# Altium PCB DRL10F322.PCBDOC
Units mm, origin at the board's own origin, x right, y up, seen from the top; angles counter-clockwise.
Board outline 152.4 x 101.6 mm, 2 copper layers (Top Layer, Bottom Layer); 35 components, 19 nets, 80 pads, 0 vias.
Unrouted connection lines stored in the file: 36.
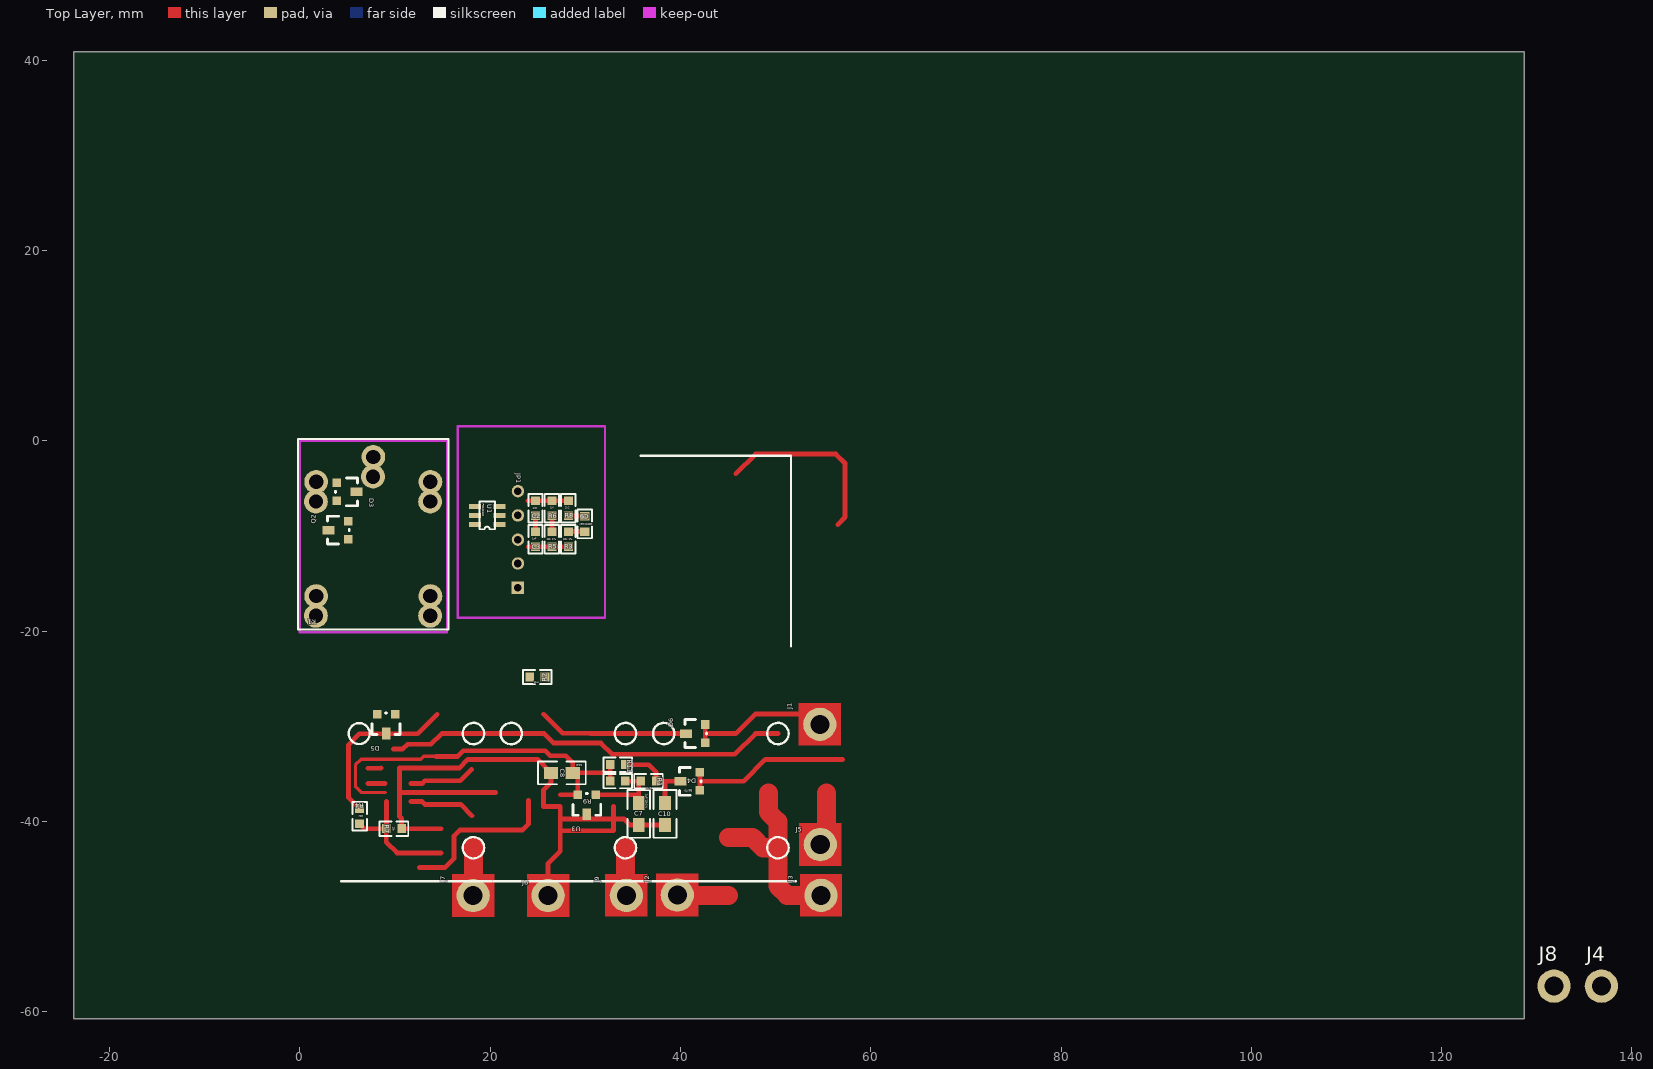
[diagram p0: Top Layer view]
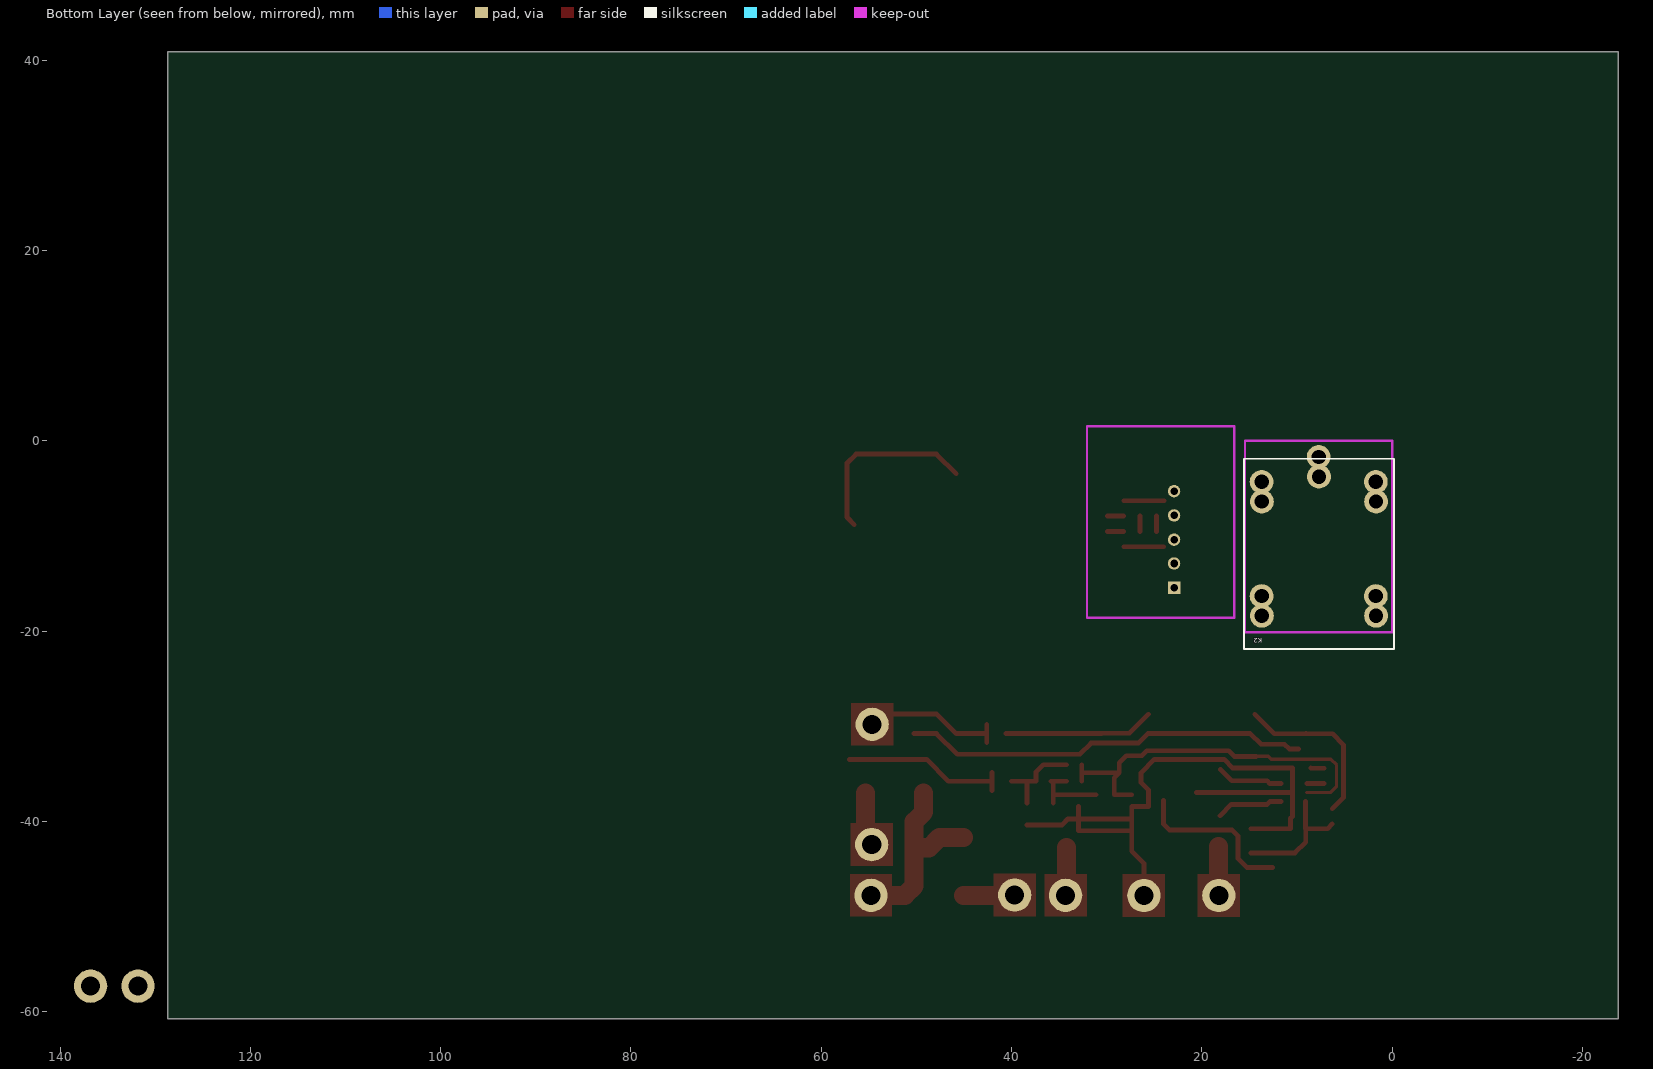
[diagram p1: Bottom Layer view, seen from below]

## Layer stack, top to bottom
Top Layer: signal copper 0.0356
Dielectric: dielectric 0.32, FR-4, Dk 4.8
Bottom Layer: signal copper 0.0356

## Board outline
-23.725,-60.75 128.675,-60.75 128.675,40.85 -23.725,40.85

## Design rules (kind name [scope] priority, off if disabled: settings)
Clearance [All] p1: gap=0.3
ComponentClearance [All] p1 off: gap=0 collisioncheckmode=3 verticalgap=0.254 showdistances=FALSE
FabricationTestPointUsage TestPointUsage [All] p1: valid=0 allowmultiple=FALSE
FabricationTestpoint Testpoint [All] p1: side=3 testpointundercomponent=TRUE minsize=1.016 maxsize=2.54 preferedsize=1.524 minholesize=0 maxholesize=1.016 preferedholesize=0.813 testpointgrid=0.025 allowsidetop=TRUE allowsidebottom=TRUE usegrid=TRUE gridtolerance=0
PolygonConnect [All] p1: connectstyle=Relief reliefconductorwidth=0.254 reliefentries=4 polygonreliefangle="90 Angle"
RoutingVias [All] p1: holewidth=0.711 width=1.27 viastyle="Through Hole" minholewidth=0.711 minwidth=1.27 maxholewidth=0.711 maxwidth=1.27
SilkscreenOverComponentPads [All] p1: minsilkscreentomaskgap=0.254
SolderMaskExpansion [All] p1: expansion=0.102
Width [All] p1: maxlimit=3 minlimit=0.25 preferedwidth=0.35 bottomlayer_prefwidth=0.25 minimp=50.000000 maximp=50.000000 favimp=50.000000
24 further rules are at their usual default settings.

## Components (designator, comment, footprint, x,y, rotation, side; value= is the part's Value field where it differs from the comment)
C2 "1nF" 0603 24.775,-7.1 r270 top
C3 "1nF" 0603 24.775,-10.35 r270 top
C7 "1uF/10k1%" 0805 35.625,-38.075 r270 top
C8 "10uF" 0805 28.7,-34.9 r180 top
C9 "100nF/25V" 0603 29.95,-8.75 r90 top
C10 "1uF/25V" 0805 38.375,-38.075 r270 top (schematic designator C?)
D3 "BAV70" SOT-23 3.9,-4.425 r270 top
D4 "BAV70" SOT-23 42.05,-36.75 r90 top
D5 "BAV70" SOT-23 10.025,-28.725 r180 top
D6 "BAV70" SOT-23 42.625,-31.725 r90 top
J1 "CON1" "SIP1 - WIRE" 54.65,-29.8 r180 top
J2 "CON1" "SIP1 - WIRE" 39.675,-47.75 r180 top
J3 "CON1" "SIP1 - WIRE" 54.775,-47.775 r180 top
J4 "CON1" "SIP1 - WIRE" 136.784,-57.324 r0 top
J5 "CON1" "SIP1 - WIRE" 54.7,-42.45 r90 top (schematic designator J?)
J6 "CON1" "SIP1 - WIRE" 26.1,-47.8 r90 top (schematic designator J?)
J7 "CON1" "SIP1 - WIRE" 18.225,-47.8 r180 top
J8 "CON1" "SIP1 - WIRE" 131.809,-57.324 r0 top
J9 "CON1" "SIP1 - WIRE" 34.325,-47.775 r180 top
JP1 "HEADER 5" "SIP5 - PGM" 22.925,-15.45 r90 top
K1 "RELAY-LF" RELAY5PIN 1.725,-4.325 r0 top
K2 "RELAY-RF" RELAY5PIN 13.7,-6.4 r180 bottom
Q2 "MMBT2222A" SOT-23 5.075,-10.35 r90 top (schematic designator Q?)
R1 "470" 0603 36.65,-35.775 r0 top
R2 "2k4" 0603 24.975,-24.825 r0 top
R3 "20k 1%" 0603 28.225,-10.35 r270 top
R4 "20k" 0603 6.3,-39.475 r90 top
R5 "10k 1%" 0603 26.5,-10.35 r270 top
R6 "1M" 0603 26.5,-7.1 r90 top
R7 "10k" 0603 9.9,-40.775 r180 top
R8 "2k2" 0603 28.225,-7.1 r270 top
R9 "10k 1%" 0603 33.425,-35.775 r180 top
R11 "1k" 0603 33.425,-34.05 r0 top
U1 "PIC10F220" "SOT23 - 6" 20.975,-8.8 r90 top
U3 "TL431" SOT-23 31.125,-37.2 r180 top (schematic designator U?)

## Footprints (in the part's own frame and the unit in brackets; to place one, negate y for a bottom-side part, rotate by r counter-clockwise, add the part's x,y. Pads: shape width x height; smd on the part's side, far side on the other; paste and mask are expansions set on the pad)
0603 [mm]
  rect 0.9x0.95 smd: 1(-0.8,0) 2(0.8,0)
  silkscreen extent -1.5,-0.75 1.5,0.75
0805 [mm]
  rect 1.5x1.25 smd: 1(0,0) 2(2.3,0)
  silkscreen extent -1.35,-1.2 3.65,1.2
RELAY5PIN [mm]
  round 2.5 hole 1.5: 1(6,2.625) 2(0,-12) 3(12,-12) 4(12,0) 5(0,0)
  silkscreen extent -1.9,-15.5 13.9,4.5
"SIP1 - WIRE" [mm]
  round 3.5 hole 2: 1(0,0)
"SIP5 - PGM" [mm]
  rect 1.3x1.3 hole 0.8: 1(0,0)
  round 1.3 hole 0.8: 2(2.55,0) 3(5.05,0) 4(7.6,0) 5(10.15,0)
"SOT23 - 6" [mm]
  rect 0.508x1.27 smd: 1(0,0) 2(0.95,0) 3(1.9,0) 4(1.9,2.55) 5(0.95,2.55) 6(0,2.55)
  silkscreen extent -0.5,0.45 2.4,2.1
SOT-23 [mm]
  rect 0.9x0.9 smd: 1(0,0) 3(1.9,0)
  rect 0.9x1.25 smd: 2(0.95,2.05)
  silkscreen extent -0.51,-0.13 2.41,2.16

## Part data
C2 C3 C7 C8 C9 C10: library part CAP, "Capacitor"
D3 D4 D5 D6: library part "DUAL DIODE BAV70"
J1 J2 J3 J4 J5 J6 J7 J8 J9: "Connector"
K1 K2: library part RELAY-SPDT
Q2: library part NPN1, "NPN Transistor"
R1 R2 R3 R4 R5 R6 R7 R8 R9 R11: library part RES1
U1: library part PIC10F206

## Nets (pads, with @x,y where several pads share a name; then routed paths per layer and width w, separated by ;. In a path a pad name is that pad's centre, name@x,y a point inside that pad or via, vN(x,y) a via of type N, cw(c..) or ccw(c..) an arc to the next point about the centre after c; other vN are vias at no path point)
B: Q2.1 R2.1 | length 1.4
  Top Layer w0.5: 7.15,-34.425 8.575,-34.4
COIL: D3.1 D3.3 K1.5 K2.4 Q2.2 | length 42.9
  Top Layer w0.5: 9.815,-32.393 10.832,-32.393 11.325,-31.9 13.79,-31.9 14.915,-30.775 25.675,-30.775 26.675,-31.775 31.65,-31.775 32.825,-32.95 45.725,-32.95 47.9,-30.775 50.275,-30.775
CONTACT: JP1.5 R4.1 R7.2 U1.6 | length 13.5
  Top Layer w0.5: R4.1 6.8,-40.775 R7.2 ; 9.125,-37.925 9.125,-40.75 R7.2 ; 14.875,-43.325 10.225,-43.325 9.1,-42.2 R7.2
GAB: J3.1 | length 20.8
  Top Layer w2: 45.05,-41.675 47.575,-41.675 48.675,-42.775 50.25,-42.775 ; 49.25,-37 49.25,-39.025 50.25,-40.025 50.25,-42.775 ; J3.1 51.225,-47.775 50.25,-46.8 50.25,-42.775
GND: C2.2 C3.1 C7.2 C8.2 C10.2 J6.1 JP1.4 Q2.3 R5.1 R6.1 R7.1 U1.2 U3.2 | length 76.1
  Top Layer w0.5: 10.505,-36.975 13.5,-36.975 ; 13.175,-36.975 20.6,-36.975 ; 14.875,-40.775 R7.1 10.7,-39.7 10.48,-39.48 10.48,-39.22 10.48,-34.4 16.775,-34.4 17.675,-33.5 25,-33.5 C8.2 26.4,-35.925 25.625,-36.7 25.625,-38.45 27.375,-38.45 27.375,-43.125 26.1,-44.4 J6.1 ; C3.1 C2.2 ; R5.1 R6.1 ; 27.375,-41 32.975,-41 32.975,-38.45 ; 27.375,-39.75 34.075,-39.75 34.7,-40.375 C10.2
IN: C10.1 D4.2 R1.2 R11.2 | length 9.3
  Top Layer w0.5: R11.2 36.675,-34.05 37.45,-34.825 R1.2 ; R1.2@37.46,-35.785 D4.2@40.018,-35.785 ; C10.1 38.375,-35.81
KL15: D6.1 D6.3 J1.1 | length 13.4
  Top Layer w0.5: D6.1 D6.3@42.625,-29.82 ; 42.625,-30.775 45.825,-30.775 47.875,-28.725 53.225,-28.725
LF: J7.1 K1.2 K2.3 | length 5.9
  Top Layer w2: J7.1@18.25,-48.55 18.25,-42.625
LG: J2.1 | length 5.4
  Top Layer w2: J2.1 39.7,-47.775 45.05,-47.775
MEASURE: C3.2 JP1.3 R3.2 R5.2 U1.1 | length 11.3
  Top Layer w0.5: 11.675,-37.925 12.85,-37.925 13.15,-38.225 16.925,-38.225 18.1,-39.4 ; 24,-11.15 C3.2 R3.2
NetC9_2: C9.2 R8.2 | length 1.7
  Top Layer w0.5: R8.2 C9.2@29.925,-7.9
OUT: R2.2 U1.4 | length 1.8
  Top Layer w0.5: 7.15,-36.025 8.975,-36.025
PEAK: C2.1 JP1.2 R6.2 R8.1 U1.3 | length 11.3
  Top Layer w0.5: 11.675,-36.025 12.85,-36.025 13.15,-35.725 16.875,-35.725 18.05,-34.55 ; 23.95,-6.3 R6.2 R8.1
POWER: C9.1 D4.1 D4.3 D5.1 D5.3 J4.1 J8.1 K1.1 K2.1 R3.1 | length 57.9
  Top Layer w0.5: 12.575,-44.85 15.275,-44.85 16.2,-43.925 16.2,-41.55 16.85,-40.9 23.425,-40.9 24.05,-40.275 24.05,-37.8 ; R3.1 C9.1 ; D4.1 D4.3@42.05,-34.845 ; 42.05,-35.775 46.65,-35.775 48.925,-33.5 57.05,-33.5 ; 45.825,-3.475 47.9,-1.4 ; 49.45,-1.4 47.9,-1.4 ; 56.525,-8.825 57.3,-8.05 57.3,-2.352 56.348,-1.4 47.9,-1.4
REF: C7.1 R1.1 R9.1 U3.1 | length 8.4
  Top Layer w0.5: U3.1 35.625,-37.2 ; R9.1 R1.1 ; C7.1 R1.1@35.625,-35.775
RELAY: D3.2 D5.2 D6.2 K1.4 K2.5 R4.2 | length 34.2
  Top Layer w0.5: 5.125,-37.075 5.125,-37.5 ; R4.2 5.125,-37.5 ; D5.2@9.017,-30.8 D5.2@9.06,-30.757 ; 14.457,-28.743 12.4,-30.8 6.275,-30.8 5.125,-31.95 5.125,-37.5 ; 25.625,-28.75 27.625,-30.75 30.55,-30.75 ; 30.55,-30.771 D6.2@40.593,-30.76
RF: J9.1 K1.3 K2.2 | length 5.9
  Top Layer w2: J9.1@34.225,-48.625 34.225,-42.775
RG: J5.1 | length 5.7
  Top Layer w2: J5.1 55.35,-41.8 55.35,-37
VCC: C8.1 JP1.1 R9.2 R11.1 U1.5 U3.3 | length 40.7
  Top Layer w0.35: 9,-36.975 6.5,-36.975 5.85,-36.325 5.85,-34.075 6.45,-33.475 12.725,-33.475 13.025,-33.175 14.325,-33.175
  Top Layer w0.5: 14.325,-33.175 16.6,-33.175 17.2,-32.575 25.775,-32.575 26.3,-33.1 27.95,-33.1 28.7,-33.85 C8.1 ; 27.375,-37.2 29.22,-37.2 29.22,-35.42 C8.1 ; R9.2 R11.1 ; 32.625,-34.875 32.6,-34.9 C8.1

## Keep-outs
Keep-Out Layer:
  lines w0.254: 0,-20.125 15.475,-20.125 15.475,0 0,0 0,-20.125 ; 16.6,-18.625 16.6,1.5 32.075,1.5 32.075,-18.625 16.6,-18.625

## Other copper
Top Layer:
  rectangle net RF: 32.1,-50.025 36.55,-45.525
  rectangle net KL15: 52.425,-32.05 56.875,-27.55
  rectangle net LF: 16,-50.05 20.45,-45.55
  rectangle net GND: 23.875,-50.05 28.325,-45.55
  rectangle net LG: 37.45,-50 41.9,-45.5
  rectangle net GAB: 52.55,-50.025 57,-45.525
  rectangle net RG: 52.475,-44.7 56.925,-40.2

## Silkscreen, mask and mechanical layers (free items; w line width, h text height)
Top Overlay:
  circle w0.25: c50.25,-42.775 r1.125
  circle w0.25: c50.25,-30.775 r1.125
  circle w0.25: c38.25,-30.775 r1.123
  circle w0.25: c34.225,-30.775 r1.125
  circle w0.25: c34.225,-42.775 r1.125
  circle w0.25: c18.25,-42.775 r1.125
  circle w0.25: c22.225,-30.775 r1.125
  circle w0.25: c18.25,-30.775 r1.125
  circle w0.25: c6.25,-30.775 r1.098
  lines w0.254: 4.35,-46.275 20.15,-46.275 ; 20.325,-46.275 36.125,-46.275 ; 35.825,-1.6 51.625,-1.6 51.625,-21.6 ; 36.35,-46.275 52.15,-46.275